# EAGLE board Telemetry Transceiver Board (EAGLE 8.3.1)
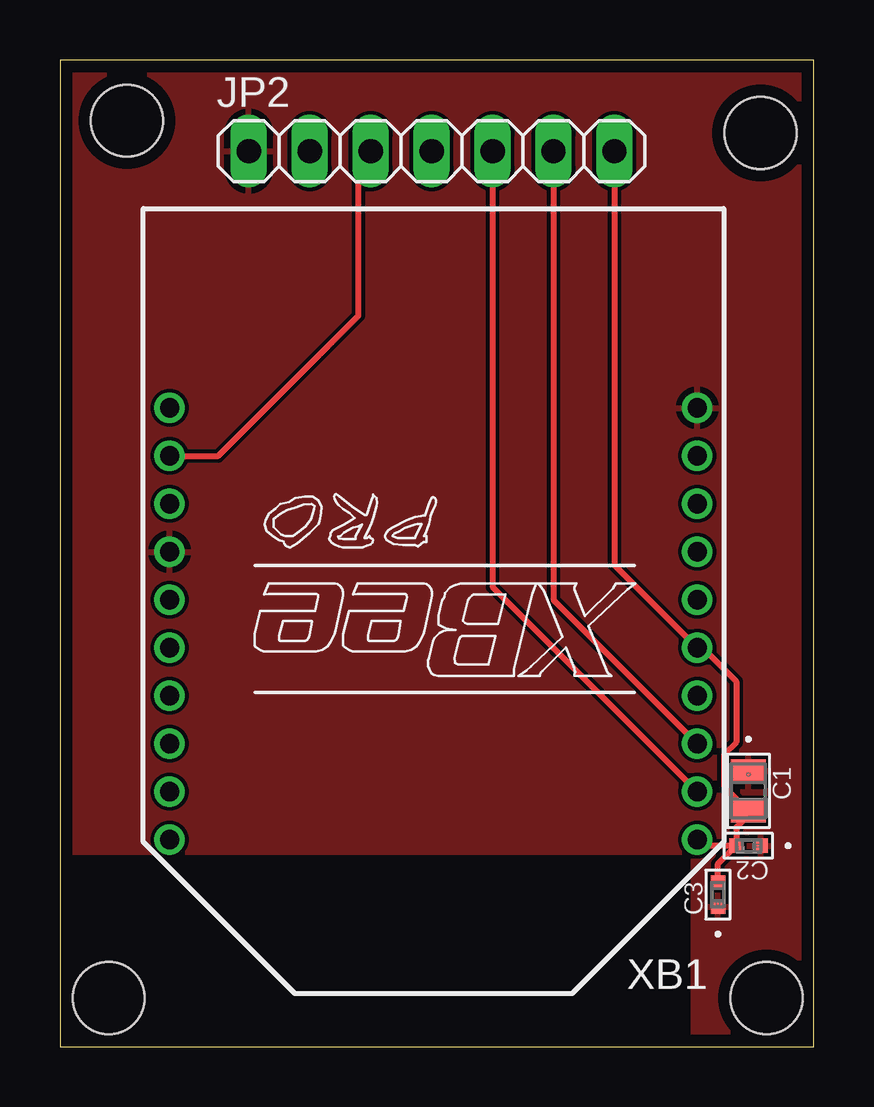
[diagram p0: board, top side]
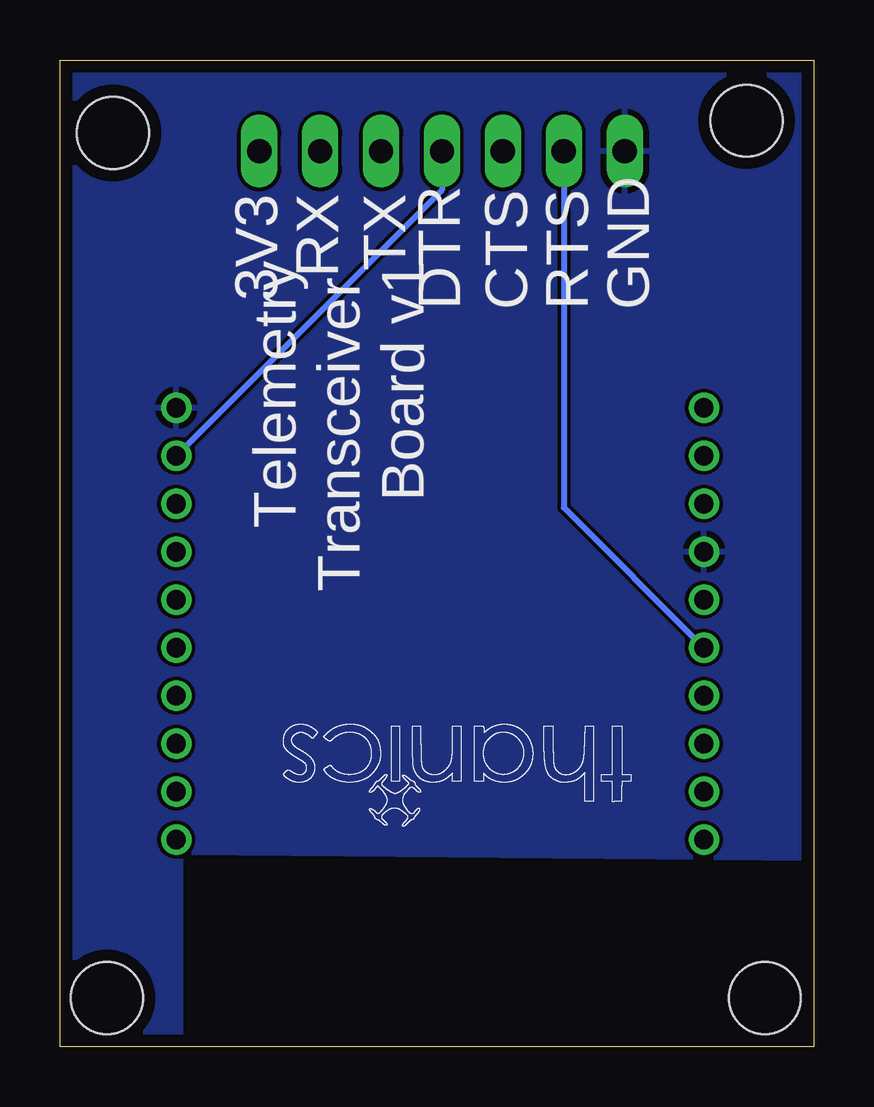
[diagram p1: board, bottom side, seen from below]

Size 31.42 x 41.14 mm. Coordinates in mm from the lower left corner, seen from the top.
Outline: 0,0 31.42,0 31.42,41.14 0,41.14 0,0
Copper layers (1*16): Top 0.035mm / dielectric 1.6mm / Bottom 0.035mm
Design rules "Elecrow_2-layer_PCB_eagle_rule": minimum track width 6mil, minimum drill 12mil, track to track 6mil, track to pad 6mil, pad to pad 6mil, via to via 8mil, smd to smd 0mil, copper to edge 20mil, drill to drill 10mil, minimum pad ring 6mil, minimum via ring 6mil, stop-mask expansion 0mil, vias tented up to drill 100mil, thermal gap 10mil
Holes 3 mm at 2.79,38.61 29.21,38.1 29.46,2.03 2.03,2.03
tRestrict: area 0,0 to 26.2,7.9
bRestrict: area 0,0 to 26.2,7.9

## Footprints (pad centres in the part's own frame; a part is rotated, then mirrored left to right if it is on the bottom)
YAG_CC0805 = smd 0.965 x 1.448: 1 -0.826,0; 2 0.826,0
G-155-M = smd 0.559 x 0.61: 1 -0.521,0; 2 0.521,0
1X07 = drill 1.016 long: 1 -7.62,0; 2 -5.08,0; 3 -2.54,0; 4 0,0; 5 2.54,0; 6 5.08,0; 7 7.62,0
XBEE-PRO = drill 0.8 pad 1.27: 1 -11,9; 2 -11,7; 3 -11,5; 4 -11,3; 5 -11,1; 6 -11,-1; 7 -11,-3; 8 -11,-5; 9 -11,-7; 10 -11,-9; 11 11,-9; 12 11,-7; 13 11,-5; 14 11,-3; 15 11,-1; 16 11,1; 17 11,3; 18 11,5; 19 11,7; 20 11,9

## Placement (x,y rotation side)
C1  1uF  [YAG_CC0805]  28.7,10.67 270 top
C2  16pF  [G-155-M]  28.7,8.38 180 top
C3  16pF  [G-155-M]  27.43,6.35 90 top
JP2  [1X07]  15.49,37.34 0 top
XB1  XBEE-PRO  [XBEE-PRO]  15.57,17.64 180 top

## Library data of the parts
C1 = Telemetry Transceiver Board; COPYRIGHT: Copyright C 2015 Accelerated Designs. All rights reserved; MANUFACTURER_PART_NUMBER: CC0805KKX7R7BB105; VENDOR: Vendor
C2 C3 = Telemetry Transceiver Board; MANUFACTURER_PART_NUMBER: GRM1555C1H160JA01D; VENDOR: Murata
JP2 = Telemetry Transceiver Board
XB1 = xbee; MPN: XBP24-AWI-001; OC_FARNELL: 1337916; OC_NEWARK: 42M2667

## Nets
!CTS: JP2.3 XB1.12
!DTR: JP2.4 XB1.9
!RTS: JP2.2 XB1.16
+3V3: C1.2 C2.2 C3.2 JP2.7 XB1.1 XB1.5
GND: C1.1 C2.1 C3.1 JP2.1 XB1.10 XB1.14
RX: JP2.6 XB1.3
TX: JP2.5 XB1.2

## Tracks (layer width: path | path; a pad name or v marks a point on that pad's centre or on a via)
!CTS
  Top 0.254: XB1.12 6.6,24.64 12.45,30.48 12.45,36.83 JP2.3
!DTR
  Bottom 0.254: JP2.4 15.49,35.71 XB1.9
!RTS
  Bottom 0.254: JP2.2 10.41,22.48 XB1.16
+3V3
  Top 0.254: JP2.7 23.11,20.09 XB1.5 26.8,16.64 28.19,15.24 28.19,12.7 27.69,12.19 27.69,10.86 C1.2 28.7,9.65 28.19,9.14 28.19,8.39 C2.2 | C3.2 27.43,7.63 C2.2 | C2.2 26.83,8.38 XB1.1
GND
  pour Top: 0,41.15 31.5,41.15 31.5,0 0,0
  pour Bottom: 0,41.15 31.5,41.15 31.5,0 0,0
RX
  Top 0.254: JP2.6 20.57,18.63 XB1.3
TX
  Top 0.254: JP2.5 18.03,19.17 XB1.2

## Text on the board
bPlace: TX | RX | 3V3 | Telemetry / Transceiver / Board v1 | GND | RTS | CTS | DTR